# Altium PCB ReflectanceDigitalTotal.PcbDoc
Units mil, origin at the board's own origin, x right, y up, seen from the top; angles counter-clockwise.
Board outline 3450 x 2510 mil, 2 copper layers (Top Layer, Bottom Layer); 17 components, 14 nets, 63 pads, 39 vias.
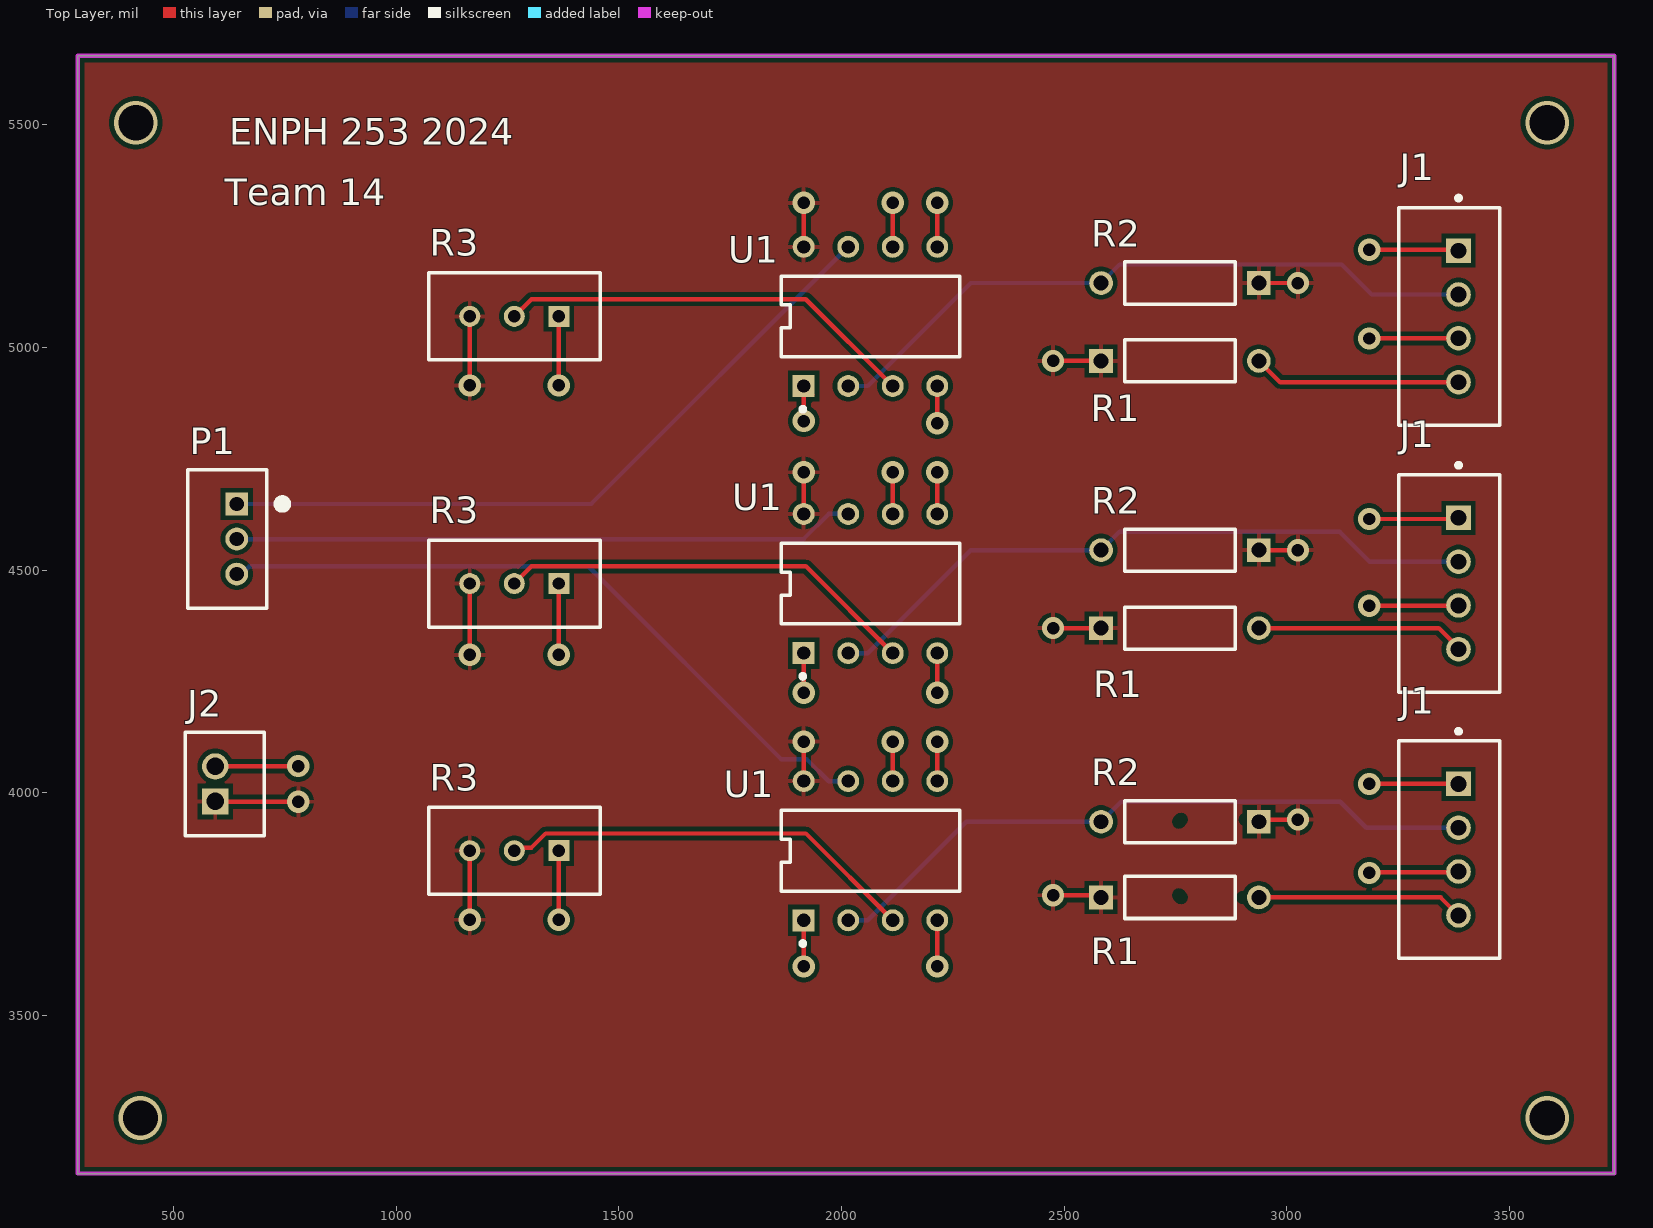
[diagram p0: Top Layer view]
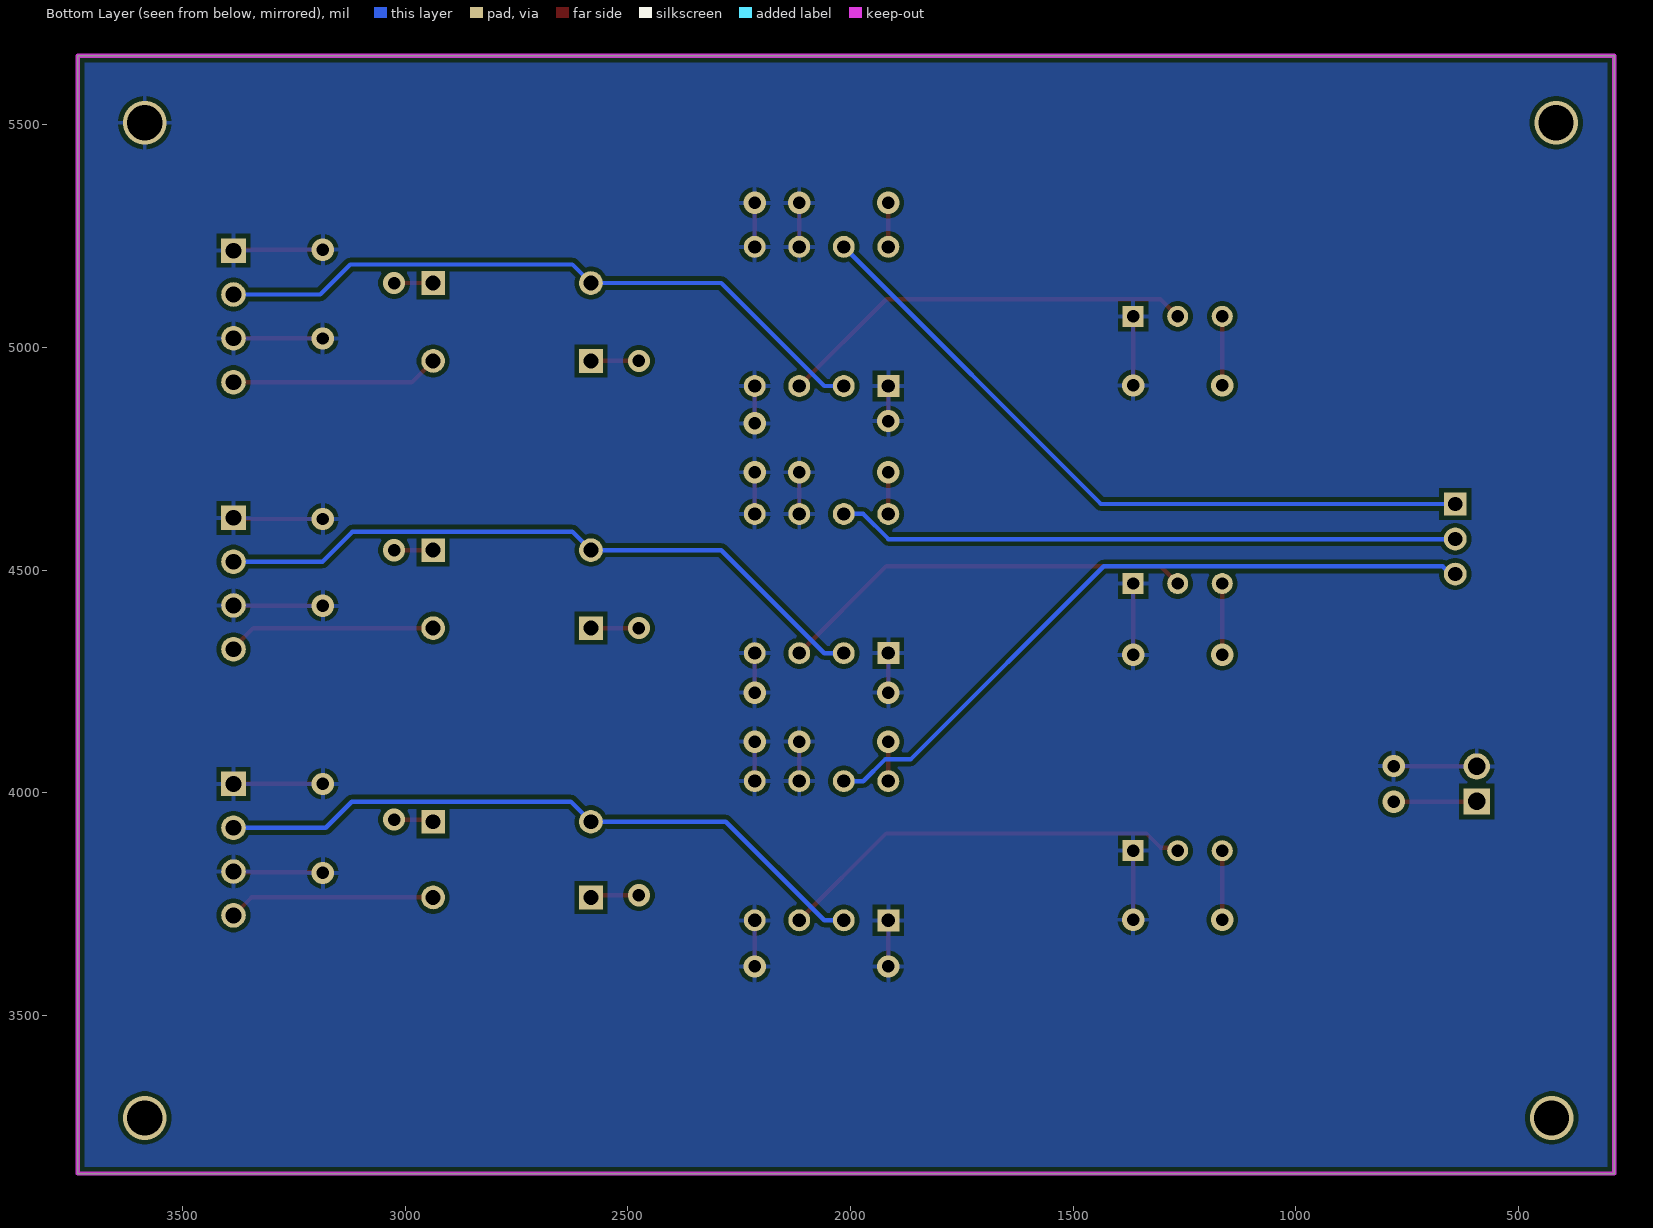
[diagram p1: Bottom Layer view, seen from below]
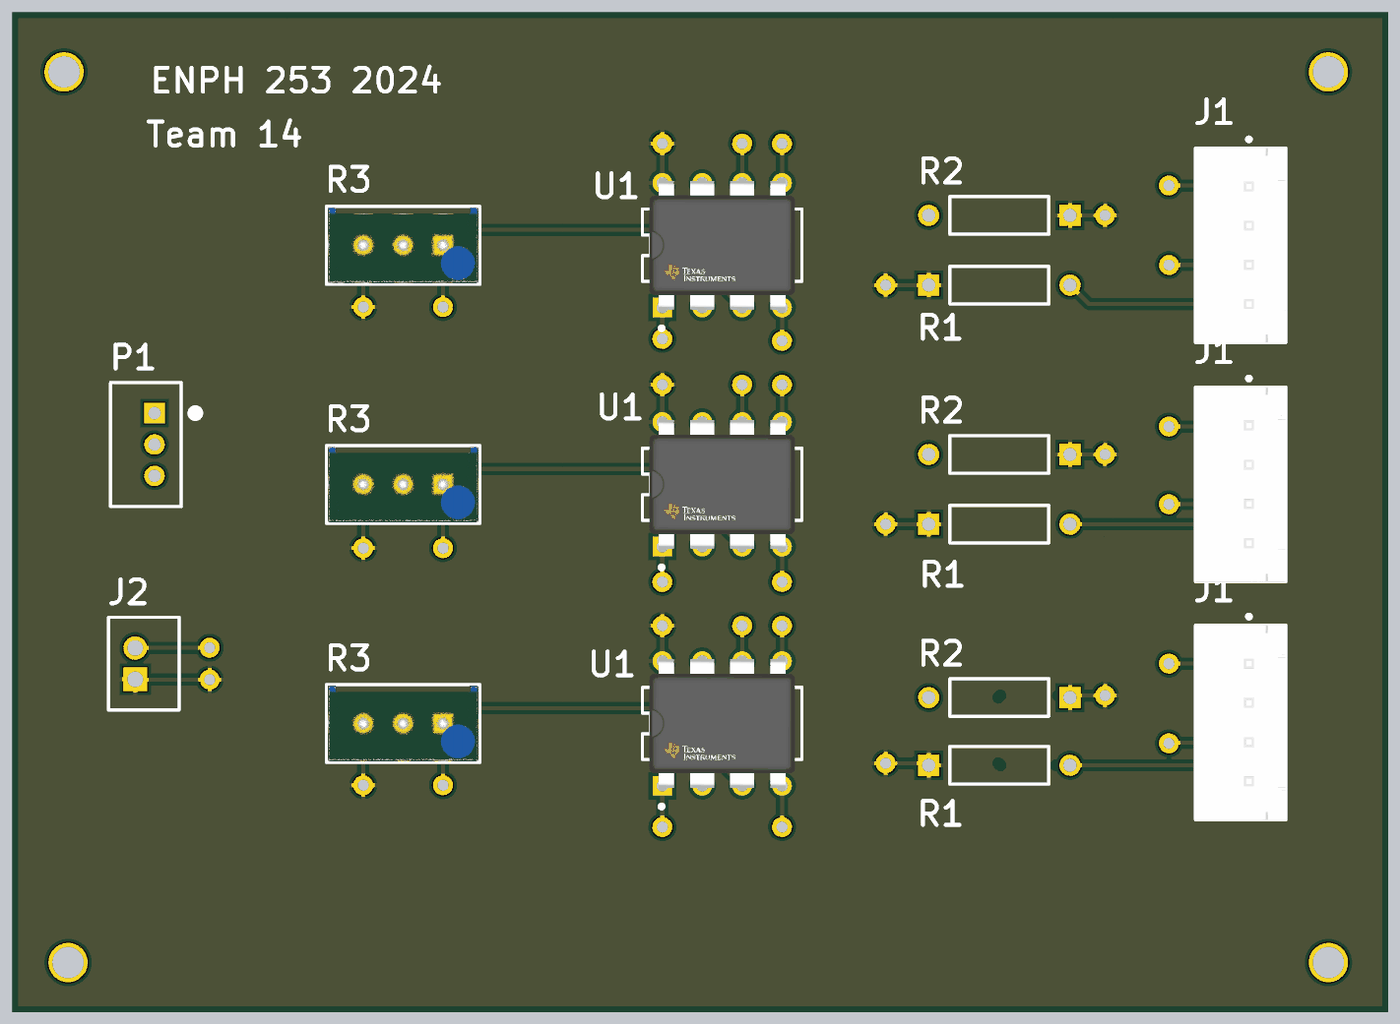
[diagram p2: 3D render of the assembled board from above, using the file's embedded part models]

## Layer stack, top to bottom
Top Solder: solder mask 0.4, Solder Resist, Dk 3.5
Top Layer: signal copper 1.4
Dielectric 1: dielectric 12.6, FR-4, Dk 4.8
Bottom Layer: signal copper 1.4
Bottom Solder: solder mask 0.4, Solder Resist, Dk 3.5

## Board outline
285,3145 3735,3145 3735,5655 285,5655

## Design rules (kind name [scope] priority, off if disabled: settings)
Clearance [All] p1: gap=10 ignorepadtopadclearanceinfootprint=FALSE
PolygonConnect [All] p1: connectstyle=Relief reliefconductorwidth=10 reliefentries=4 polygonreliefangle="90 Angle" airgapwidth=10
RoutingVias [All] p1: holewidth=28 width=50 viastyle="Through Hole" minholewidth=28 minwidth=50 maxholewidth=28 maxwidth=50
SolderMaskExpansion [All] p1: expansion=4 istentingtop=FALSE
SupplyNets "Schematic Supply Nets_1" [InNet('GND')] p1: voltage=0.000
SupplyNets "Schematic Supply Nets" [InNet('5V')] p2: voltage=0.000
Width [All] p1: maxlimit=10 minlimit=10 preferedwidth=10
30 further rules are at their usual default settings.

## Classes and differential pairs
channel class ReflectanceSensor: U_ReflectanceSensor1 U_ReflectanceSensor2 U_ReflectanceSensor3
component class U_ReflectanceSensor3: R1 R2 R3 U1
component class U_ReflectanceSensor2: J1 R1 R2 R3 U1
component class U_ReflectanceSensor1: J1 R1 R2 R3 U1
component class ReflectanceDigitalTotal: J2 P1

## Components (designator, comment, footprint, x,y, rotation, side; value= is the part's Value field where it differs from the comment)
J1 "B4B-XH-A(LF)(SN)" FP-B4B-XH-A_LF_SN-MFG 3365,4470 r90 top
J1 "B4B-XH-A(LF)(SN)" FP-B4B-XH-A_LF_SN-MFG 3365,3872.36 r90 top
J1 "B4B-XH-A(LF)(SN)" FP-B4B-XH-A_LF_SN-MFG 3365,5070 r90 top
J2 "B2B-PH-K-S(LF)(SN)" JST-B2B-PH-K-S_V 615,4020 r90 top
P1 "B3B-PH-K-S(LF)(SN)" JST-B3B-PH-K-S-3_V 620,4570 r270 top
R1 "330R" RESA60-630X240 2760,4370 r0 top
R1 "330R" RESA60-630X240 2760,3765 r0 top
R1 "330R" RESA60-630X240 2760,4970 r0 top
R2 "47K" RESA60-630X240 2760,4545 r180 top
R2 "47K" RESA60-630X240 2760,3935 r180 top
R2 "47K" RESA60-630X240 2760,5145 r180 top
R3 "10K" FP-3296W-MFG 1265,4469.8 r90 top
R3 "10K" FP-3296W-MFG 1265,3869.8 r90 top
R3 "10K" FP-3296W-MFG 1265,5070 r90 top
U1 "LM311P" FP-P0008A-MFG 2065,4470 r90 top
U1 "LM311P" FP-P0008A-MFG 2065,3870 r90 top
U1 "LM311P" FP-P0008A-MFG 2065,5070 r90 top

## Footprints (in the part's own frame and the unit in brackets; to place one, negate y for a bottom-side part, rotate by r counter-clockwise, add the part's x,y. Pads: shape width x height; smd on the part's side, far side on the other; paste and mask are expansions set on the pad)
FP-3296W-MFG [mm]
  rect 1.2x1.2 hole 0.7 paste-2539.97 mask+0: 1(0.005,-2.54)
  round 1.2 hole 0.7 paste-2539.97 mask+0: 2(0.005,0) 3(0.005,2.54)
  silkscreen extent -2.48,-4.89 2.48,4.89, body extent -2.58,-4.99 2.58,4.99, height 0.25
FP-B4B-XH-A_LF_SN-MFG [mm]
  rect 1.4x1.4 hole 0.9 paste-2539.97 mask+0: 1(3.75,-0.525)
  round 1.4 hole 0.9 paste-2539.97 mask+0: 2(1.25,-0.525) 3(-1.25,-0.525) 4(-3.75,-0.525)
  silkscreen extent -6.2,-2.88 6.87,2.88, body extent -6.3,-2.98 6.3,2.98, height 0.25
FP-P0008A-MFG [mm]
  rect 1.25x1.25 hole 0.75 paste-2539.97 mask+0: 1(-3.97,3.81)
  round 1.25 hole 0.75 paste-2539.97 mask+0: 2(-3.97,1.27) 3(-3.97,-1.27) 4(-3.97,-3.81) 5(3.97,-3.81) 6(3.97,-1.27) 7(3.97,1.27) 8(3.97,3.81)
  silkscreen extent -5.42,-5.08 2.3,5.08, body extent -4.69,-5.18 4.69,5.18, height 0.25
JST-B2B-PH-K-S_V [mm] "Connector, 2-Leads, Body 5.9x4.5mm, Pitch 2mm"
  rect 1.5x1.5 hole 1: 1(-1,0.55)
  round 1.5 hole 1: 2(1,0.55)
  silkscreen extent -2.95,-2.25 2.95,2.25, body extent -2.95,-2.25 2.95,2.25, height 6
JST-B3B-PH-K-S-3_V [mm] "Connector, 3-Leads, Body 7.9x4.5mm, Pitch 2mm"
  rect 1.3x1.3 hole 0.8: 1(-2,0.55)
  round 1.3 hole 0.8: 2(0,0.55) 3(2,0.55)
  silkscreen extent -3.95,-2.25 3.95,3.4, body extent -3.95,-2.25 3.95,2.25, height 6
RESA60-630X240 [mm] "Axial Resistor, 2-Leads, Dia 2.4mm, Body Length 6.3mm"
  rect 1.35x1.35 hole 0.85: 1(-4.5,0)
  round 1.35 hole 0.85: 2(4.5,0)
  silkscreen extent -3.15,-1.2 3.15,1.2, body extent -3.15,-1.2 3.15,1.2, height 2.4

## Part data
J1 J1 J1: library part CMP-17439-000250-1, "CONN HEADER VERT 4POS 2.5MM", Color=Natural, Contact Resistance=20mR, Current Rating=3A, Flammability Rating="UL94 V-0", Housing Color=White, Insulation Resistance=1GR, Max Operating Temperature=85°C, Max Voltage Rating (AC)=250V, Min Operating Temperature=-25°C, Package Quantity=500, Connector Type=Header, Contact Finish - Mating=TIN, Contact Material=Brass, Contact Plating=Tin, Contact Shape=Square, Contact Type="Male Pin", Depth=5.75mm, Fastening Type=Detent, Gender=Male, Housing Material=Polyamide, Insulation Color=Natural, Insulation Material=Nylon, Lead Free="Lead Free", Lead Pitch=2.5mm, Length=12.4mm, Mated Stacking Heights=9.8mm, Material=Polyamide, Max Current Rating=3A, Max Voltage Rating (DC)=250V, Mount="Through Hole", Number of Contacts=4, Number of Positions=4, Number of Rows=1, Orientation=Straight, Packaging=Bulk, Pitch=2.5mm, REACH SVHC="No SVHC", Series=XH, Termination=Solder, Voltage Rating=250V, Voltage Rating (AC)=250V, Wire/Cable Gauge=22AWG
J2: library part CMP-2000-05162-1, "Male Header, Pitch 2 mm, 1 x 2 Position, Height 6 mm, Tail Length 3.4 mm, -25 to 85 degC, RoHS, Bulk", Manufacturer=JST, Datasheet URL=http://datasheet.octopart.com/B2B-PH-K-S%28LF%29%28SN%29-JST-datasheet-8324864.pdf, Datasheet Version=Nov-08, Manufacturer URL=http://www.jst.com/home2.html, No of Positions=2, Pitch=2mm, Style/Orientation=StraightHeader/Plug, Termination=Crimp, Type=ShroudedHeader
P1: library part CMP-2000-05164-1, "Male Header, Pitch 2 mm, 1 x 3 Position, Height 6 mm, Tail Length 3.4 mm, -25 to 85 degC, RoHS, Bulk", Manufacturer=JST, Datasheet URL=https://datasheet.ciiva.com/11746/0900766b80826550-11746939.pdf, Datasheet Version=Oct-06, Manufacturer URL=http://www.jst.com/home2.html, No of Positions=3, Pitch=2mm, Style/Orientation=StraightHeader/Plug, Termination=Crimp, Type=ShroudedHeader
R1 R1 R1 R2 R2 R2: library part CMP-1659-00073-1, "Axial Resistor, 100 KOhm, +/- 1%, 0.25 W, -55 to 155 degC, 2-Pin THD, RoHS, Bulk", Case\Package=Axial, Max Operating Temperature="155 degC", Min Operating Temperature="-55 degC", Package Quantity=200, Power Rating="250 mW", Resistance="475 Ohm", Tolerance=1%, Voltage Rating="250 V", ComponentLink1Description="Manufacturer URL", ComponentLink1URL=http://www.yageo.com/, ComponentLink2Description=Datasheet, ComponentLink2URL=http://www.yageo.com/documents/recent/Yageo%20LR_MFR_2013.pdf, DatasheetVersion=Apr-13, Length="0.248 inch", Mount="Through Hole", PackageDescription="2-Pin Axial Lead, Dia 2.4 mm, Body Length 6.3 mm", PackageReference=MFR-25, Packaging=Bulk, RoHSCompliant=true
R3 R3 R3: library part CMP-2000-05582-2, "TRIMMER 2K OHM 0.5W PC PIN TOP", Color=Blue, Max Operating Temperature=125°C, Max Power Dissipation=500mW, Min Operating Temperature=-55°C, Package Quantity=50, Resistance=2kR, Resistance Tolerance=10%, Resistor Type=Cermet, Temperature Coefficient=100ppm/°C, Contact Plating=Tin, Depth=4.83mm, Height=0.395inch, Lead Free="Lead Free", Length=9.53mm, Military Standard=Not, Mount=Panel, Number of Turns=25, Packaging=Rail/Tube, Power Rating=500mW, Radiation Hardening=No, REACH SVHC="No SVHC", RoHS Compliant=Yes, Series=3296, Taper=Linear, Technology=CERMET, Termination=Pin, Tolerance=10%, Weight=0.03oz, Width=9.53mm
U1 U1 U1: library part CMP-1685-00016-2, Ambient Temperature Range High=70°C, Case Code (Imperial)=0603, Case Code (Metric)=1608, Case/Package=PDIP, Dual Supply Voltage=9V, Input Bias Current=250nA, Input Offset Voltage (Vos)=2mV, Manufacturer Lifecycle Status=ACTIVE, Max Dual Supply Voltage=15V, Max Junction Temperature (Tj)=150°C, Max Output Voltage=7.5mV, Max Power Dissipation=500mW, Max Supply Current=7.5mA, Max Supply Voltage=30V, Min Dual Supply Voltage=1.75V, Min Operating Temperature=0°C, Min Supply Voltage=3.5V, Operating Supply Voltage=28V, Output Current=50mA, Power Rating=100mW, Resistance=390Ω, Tolerance=1%, Voltage Gain=106.02dB, Voltage Rating=75V, Contact Plating=Gold, Height=5.08mm, Lead Free="Lead Free", Length=9.81mm, Lifecycle Status=Production, Max Input Current=250nA, Max Operating Temperature=70°C, Mount="Surface Mount, Through Hole", NexarPartId=24336, Nominal Supply Current=7.5mA, Number of Channels=1, Number of Circuits=1, Number of Elements=1, Number of Pins=8, Output Current per Channel=50mA, Output Type=TTL, Packaging="Tape and Reel", Propagation Delay=115ns, Quiescent Current=7.5mA, Radiation Hardening=No, REACH SVHC="No SVHC", Response Time=165ns, RoHS=Compliant, Schedule B="8542390000, 8542390000", Thickness=3.9mm, Turn-On Delay Time=115ns, Type="General Purpose", Weight=2.012816mg, Width=6.35mm

## Free pads (board coordinates)
  round 60 on Mech16: 4(420,5515)

## Via types
v1: diameter 50, hole 28, Top Layer to Bottom Layer, 35 vias
v2: diameter 98.43, hole 78.74, Top Layer to Bottom Layer, 4 vias

## Nets (pads, with @x,y where several pads share a name; then routed paths per layer and width w, separated by ;. In a path a pad name is that pad's centre, name@x,y a point inside that pad or via, vN(x,y) a via of type N, cw(c..) or ccw(c..) an arc to the next point about the centre after c; other vN are vias at no path point)
5V: J2.1 R1.1 R2.1 R3.3 U1.8 | length 1490.2
  Top Layer w10: J2.1 593.98,3980 v1(780,3980) ; v1(1165,3715) R3.3@1165,3870 ; v1(1165,4310) R3.3@1165,4470 ; v1(1165,4915) R3.3@1165,5070.2 ; U1.8@1915,4026.3 v1(1915,4115) ; U1.8@1915,4626.3 v1(1915,4720) ; U1.8@1915,5226.3 v1(1915,5325) ; v1(2475,3770) R1.1@2582.83,3770 ; v1(2475,4370) R1.1@2567.83,4370 ; v1(2475,4970) R1.1@2582.83,4970 ; R2.1@2922.17,4545 2937.17,4545 v1@3015,4545 ; R2.1@2937.17,3940 v1@3000,3940 ; R2.1@2937.17,5145 v1(3025,5145)
  other v1: 3025,3940 3025,4545
GND: J1.1 J1.3 J2.2 R3.1 U1.1 U1.4 U1.5 U1.6 | length 3009.5
  Top Layer w10: J2.2 593.66,4059.69 779.69,4059.69 v1(780,4060) ; v1(1365,3715) R3.1@1365,3870 ; v1(1365,4310) R3.1@1365,4470 ; v1(1365,4915) R3.1@1365,5070.2 ; v1(1915,3610) U1.1@1915,3713.7 ; v1(1915,4225) U1.1@1915,4313.7 ; v1(1915,4835) 1915,4913.7 U1.1@1934.61,4894.09 ; U1.6@2115,4026.3 v1(2115,4115) ; v1(2115,4720) 2115,4626.3 U1.6@2117.47,4628.77 ; U1.6@2115,5226.3 v1(2115,5325) ; v1(2215,3610) U1.4@2215,3713.7 ; U1.5@2215,4026.3 v1@2215,4110 ; v1(2215,4225) 2215,4313.7 U1.4@2222.5,4306.2 ; v1(2215,4720) 2215,4626.3 U1.5@2217.47,4628.77 ; v1(2215,4830) U1.4@2215,4913.7 ; U1.5@2215,5226.3 v1(2215,5325) ; v1@3185,3821.57 3383.99,3821.57 J1.3@3385.67,3823.26 ; v1(3185,4020) 3385.62,4020 J1.1@3385.67,4020.05 ; v1(3185,4420) 3185.39,4420.39 3385.28,4420.39 J1.3@3385.67,4420.79 ; v1(3185,4615) J1.1@3383.03,4615 ; v1(3185,5220) 3383.31,5220 J1.1@3385.67,5217.64 ; v1@3185.79,5020.79 J1.3@3385.67,5020.79
  other v1: 3185,3820 2215,4115 3185.39,5020.39
  other v2: 3585,5505
NetJ1_U_ReflectanceSensor1_2: J1.2@3385.67,5119.21 R2.2@2582.83,5145 U1.2@2015,4913.7 | length 1511.6
  Bottom Layer w10: U1.2@2015,4913.7 2058.99,4913.7 2290.29,5145 2582.83,5145 2624.41,5186.57 3123.43,5186.57 3190.79,5119.21 J1.2@3385.67,5119.21
NetJ1_U_ReflectanceSensor1_4: J1.4@3385.67,4922.36 R1.2@2937.17,4970 | length 468.2
  Top Layer w10: R1.2@2937.17,4970 2984.8,4922.36 J1.4@3385.67,4922.36
NetJ1_U_ReflectanceSensor2_2: J1.2@3385.67,3921.57 R2.2@2582.83,3935 U1.2@2015,3713.7 | length 1484.5
  Bottom Layer w10: U1.2@2015,3713.7 2058.99,3713.7 2280.29,3935 2582.83,3935 2627.83,3980 3120,3980 3178.43,3921.57 J1.2@3365,3921.57
NetJ1_U_ReflectanceSensor2_4: J1.4@3385.67,3724.72 R1.2@2937.17,3765 | length 465.2
  Top Layer w10: R1.2@2937.17,3765 3345.39,3765 J1.4@3385.67,3724.72
NetJ1_U_ReflectanceSensor3_2: J1.2@3385.67,4519.21 R2.2@2582.83,4545 U1.2@2015,4313.7 | length 1518
  Top Layer w10: U1.2@2015,4313.7 U1.2@2019.56,4318.26
  Bottom Layer w10: U1.2@2015,4313.7 2058.99,4313.7 2290.29,4545 2582.83,4545 2624.41,4586.57 3118.43,4586.57 3185.79,4519.21 J1.2@3385.67,4519.21
NetJ1_U_ReflectanceSensor3_4: J1.4@3385.67,4322.36 R1.2@2937.17,4370 | length 483.2
  Top Layer w10: R1.2@2922.17,4370 3338.03,4370 ; 3341.18,4370 J1.4@3388.82,4322.36
NetP1_1: P1.1 U1.7@2015,5226.3 | length 1612.6
  Bottom Layer w10: P1.1 1437.44,4648.74 U1.7@2015,5226.3
NetP1_2: P1.2 U1.7@2015,4626.3 | length 1396.7
  Bottom Layer w10: P1.2 1914.71,4570 1971.01,4626.3 U1.7@2015,4626.3
NetP1_3: P1.3 U1.7@2015,4026.3 | length 1580.3
  Bottom Layer w10: P1.3 652.8,4491.26 670.16,4508.62 1431.38,4508.62 1865,4075 1922.31,4075 1971.01,4026.3 U1.7@2015,4026.3
NetR3_U_ReflectanceSensor1_2: R3.2@1265,5070.2 U1.3@2115,4913.7 | length 946.8
  Top Layer w10: R3.2@1265,5070.2 1303.62,5108.82 1919.88,5108.82 U1.3@2115,4913.7
NetR3_U_ReflectanceSensor2_2: R3.2@1265,3870 U1.3@2115,3713.7 | length 946.7
  Top Layer w10: R3.2@1265,3870 1272.08,3877.08 1303.62,3877.08 1335.16,3908.62 1920.08,3908.62 U1.3@2115,3713.7
NetR3_U_ReflectanceSensor3_2: R3.2@1265,4470 U1.3@2115,4313.7 | length 946.7
  Top Layer w10: R3.2@1265,4470 1303.62,4508.62 1920.08,4508.62 U1.3@2115,4313.7
copper on no net:
  other v2: 425,3270 3585,3270 415,5505

## Polygon pours and split planes (outlines as drawn)
GND on Bottom Layer "GND_L02_P001" (solid, pour order 1): 285,5655 3735,5655 3735,3145 285,3145
5V on Top Layer "5V_L01_P000" (solid, pour order 0): 285,5655 3735,5655 3735,3145 285,3145

## Keep-outs
Keep-Out Layer:
  the board outline again, w10

## Silkscreen, mask and mechanical layers (free items; w line width, h text height)
Top Overlay:
  text "ENPH 253 2024" at 625,5455 h60
  text "Team 14" at 615,5320 h60